# Altium PCB MFU 1.00.PcbDoc (part 2 of 2)
Units mm, origin at the board's own origin, x right, y up, seen from the top; angles counter-clockwise.
Board outline 134 x 96 mm, 2 copper layers (Top Layer, Bottom Layer), stack 1.6 mm thick; 195 components, 155 nets, 750 pads, 199 vias.
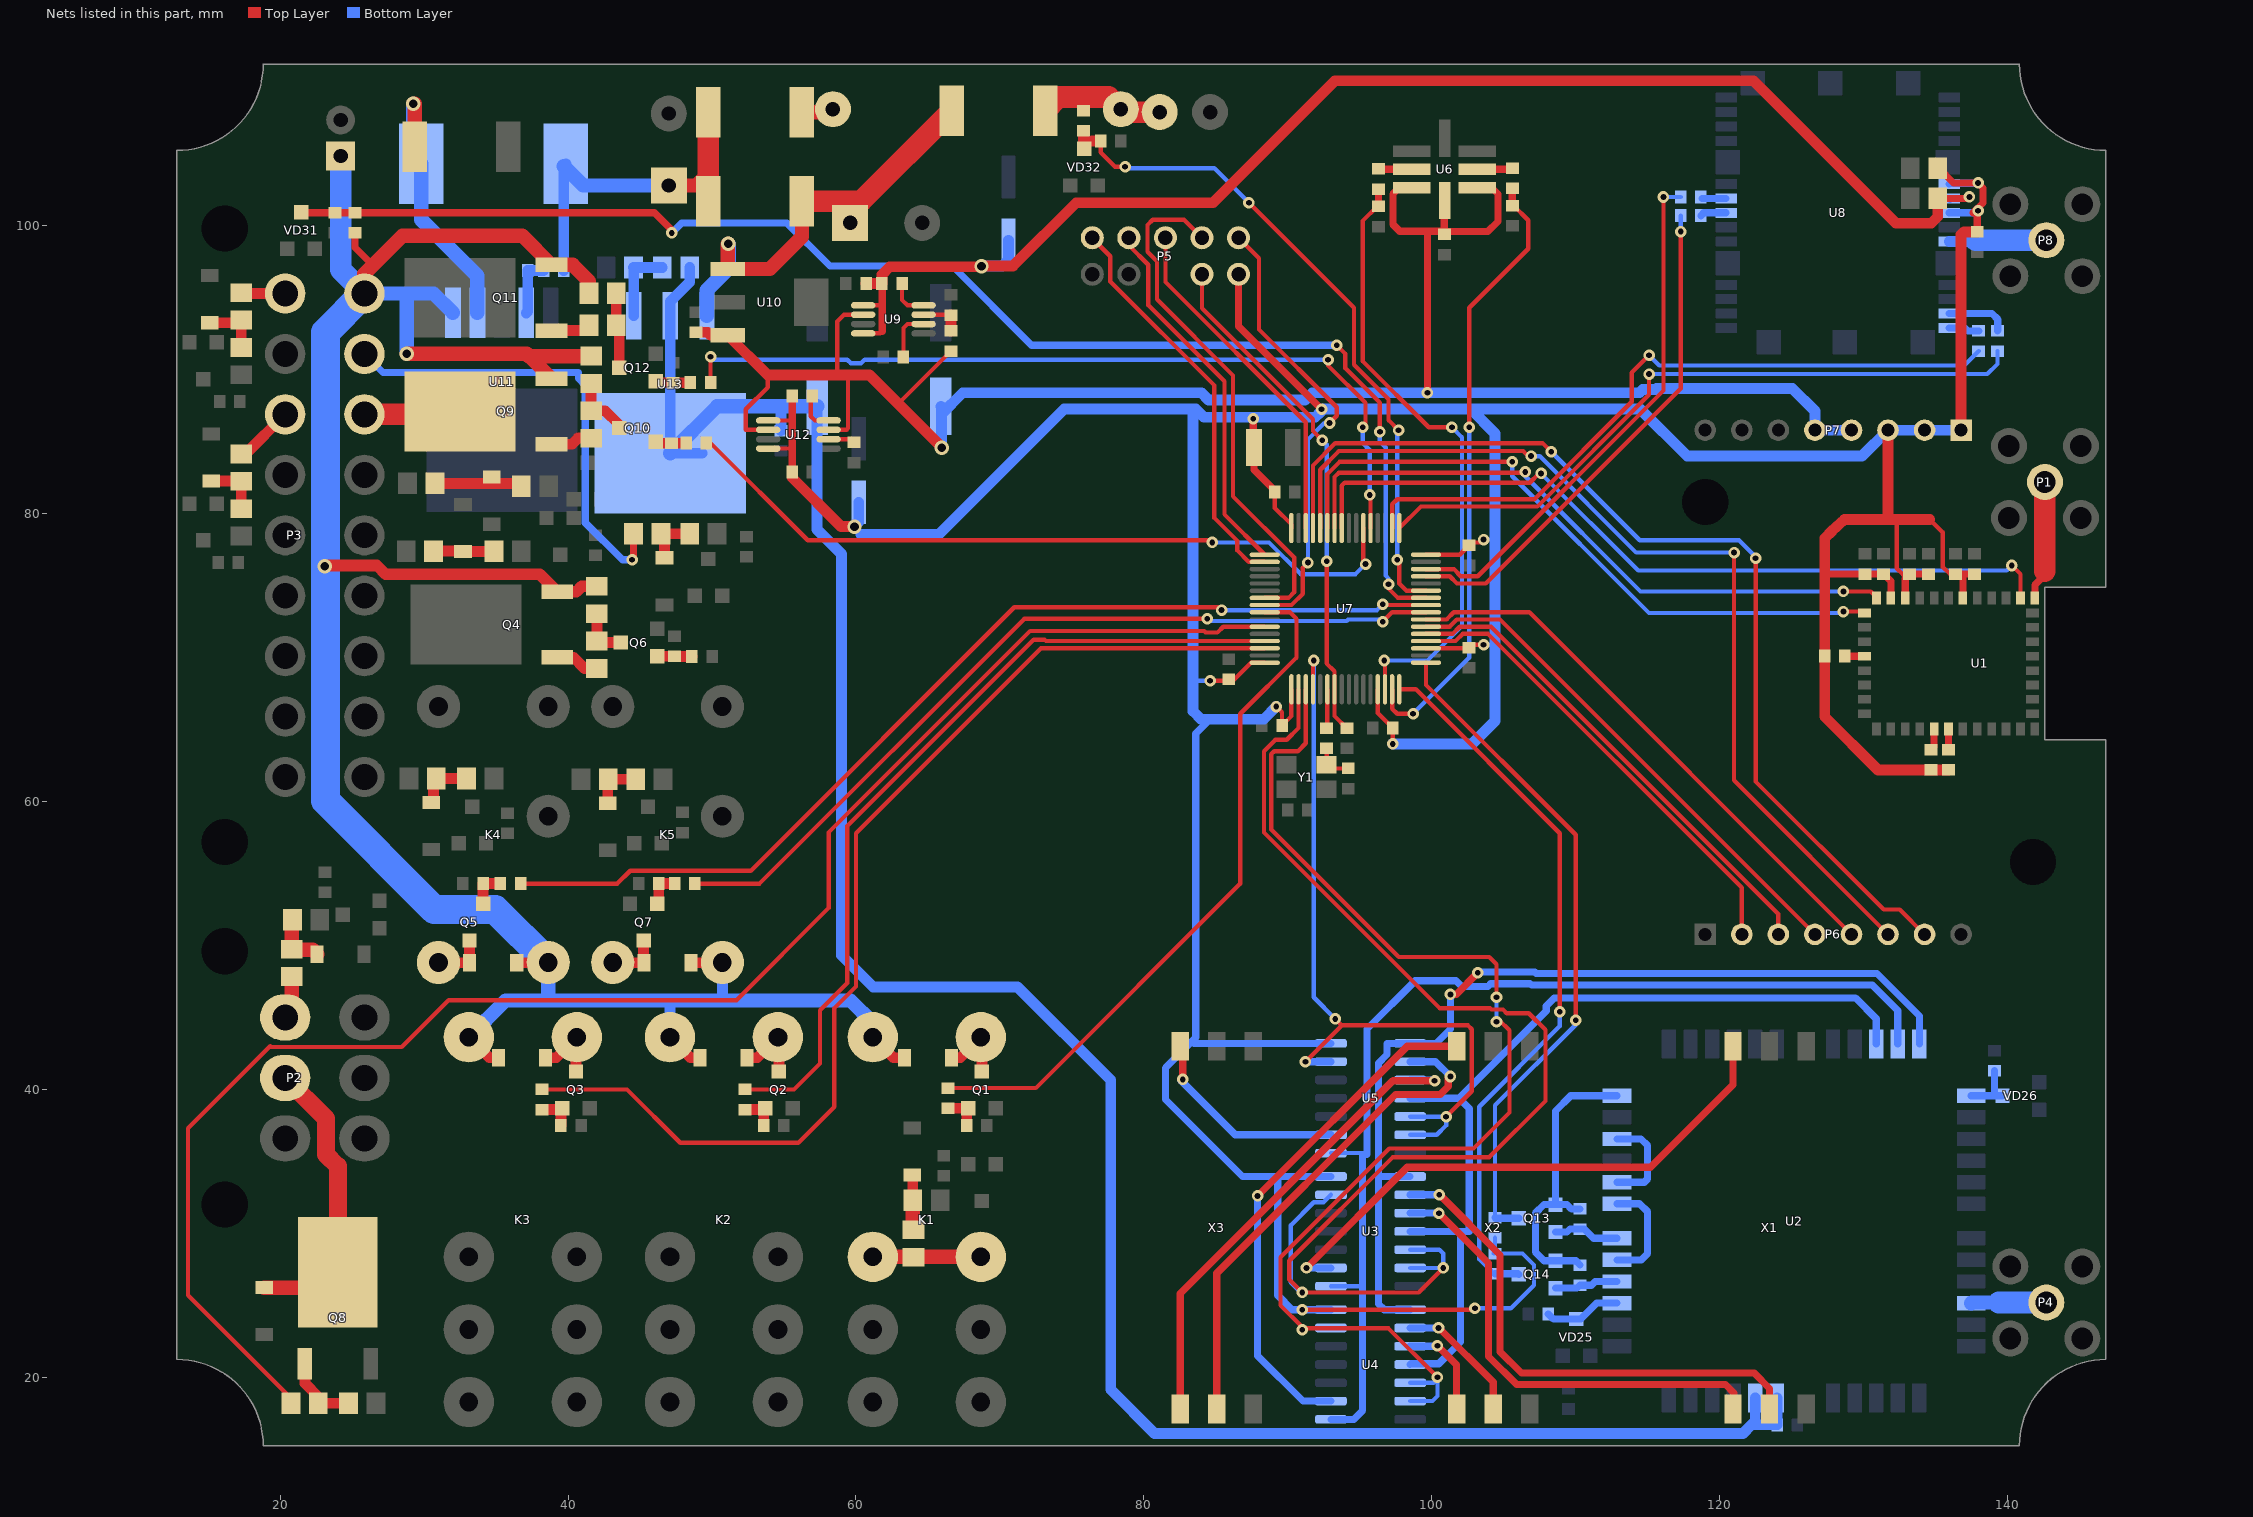
[diagram p2: the nets of this part, all layers, seen from the top]

## Via types
v1: diameter 0.8, hole 0.4, Top Layer to Bottom Layer, tented both sides, 192 vias
v2: diameter 1, hole 0.6, Top Layer to Bottom Layer, tented both sides, 7 vias

## Nets (pads, with @x,y where several pads share a name; then routed paths per layer and width w, separated by ;. In a path a pad name is that pad's centre, name@x,y a point inside that pad or via, vN(x,y) a via of type N, cw(c..) or ccw(c..) an arc to the next point about the centre after c; other vN are vias at no path point) (continued)
NetC20_1: C20.1 R56.1 Y1.1 | length 3
  Top Layer w0.3: R56.1@92.7,63.9 Y1.1@92.7,62.55 92.95,62.3 C20.1@94.2,62.3
NetC32_1: C32.1 R61.1 U9.7 | length 3
  Top Layer w0.3: U9.7@64.7,93.825 66.575,93.825 C32.1@66.6,93.8
  Top Layer w0.75: R61.1@66.6,92.7 C32.1@66.6,93.8
NetC35_1: C35.1 U9.6 | length 3.5
  Top Layer w0.3: C35.1@63.3,90.9 63.3,92.9 63.575,93.175 U9.6@64.7,93.175
NetC37_1: C37.1 L1.2 R62.2 VD27.2 VD30.2 | length 24.6
  Top Layer w1: C37.1@47,102.8 48.9,102.8 49.75,103.65
  Top Layer w1.5: VD27.2@49.75,101.7 49.75,103.65 VD30.2@49.75,107.9
  Bottom Layer w0.75: R62.2@39.7,96.9 39.7,104.15 L1.2@39.85,104.3
  Bottom Layer w1: L1.2@39.7,104.15 41.05,102.8 C37.1@47,102.8
NetC38_1: C38.1 U10.1 U13.3 VD27.1 VD29.1 | length 30.8
  Top Layer w1: v2(51.125,98.75) 51.1,98.725 U10.1@51.1,97 54,97 56.25,99.25 VD27.1@56.25,101.7
  Top Layer w1.5: VD27.1@56.25,101.7 60.35,101.7 ; C38.1@59.6,100.2 59.6,100.95 60.35,101.7 ; VD29.1@66.65,108 60.35,101.7
  Bottom Layer w1: U13.3@49.64,93.75 49.64,95.515 51.175,97.05 51.175,98.7 v2(51.125,98.75)
NetC45_1: C45.1 U12.6 | length 1.8
  Top Layer w0.3: U12.6@58.1,85.175 59.625,85.175 C45.1@59.85,84.95
NetK1_1: K1.1 Q1.3 VD3.2 | length 5
  Top Layer w0.75: VD3.2@66.635,42.2 67.245,42.2 K1.1@68.675,43.63 68.75,43.555 Q1.3@68.75,41.25
NetK1_4: K1.4 R4.1 | length 7.5
  Top Layer w1: K1.4@61.175,28.37 K1.4@68.675,28.37
NetK2_1: K2.1 Q2.3 VD4.2 | length 5.1
  Top Layer w0.75: VD4.2@52.435,42.2 53.148,42.2 K2.1@54.578,43.63 54.65,43.558 Q2.3@54.65,41.25
NetK3_1: K3.1 Q3.3 VD5.2 | length 5.1
  Top Layer w0.75: VD5.2@38.435,42.2 39.178,42.2 K3.1@40.55,43.572 ; Q3.3@40.55,41.25 K3.1@40.55,43.572 ; K3.1@40.608,43.63 K3.1@40.55,43.572
NetK4_1: K4.1 Q5.3 VD6.2 | length 3.7
  Top Layer w0.75: K4.1@31,48.82 31.02,48.8 VD6.2@33.165,48.8 33.15,48.815 Q5.3@33.15,50.35
NetK5_1: K5.1 Q7.3 VD7.2 | length 3.7
  Top Layer w0.75: K5.1@43.1,48.82 43.12,48.8 VD7.2@45.265,48.8 45.25,48.815 Q7.3@45.25,50.35
NetL1_1: L1.1 U11.2 VD28.1 | length 19.4
  Top Layer w1: v2(29.25,108.475) 29.35,108.475 VD28.1@29.35,105.5
  Bottom Layer w1: v2(29.25,108.475) 29.25,104.85 L1.1@29.8,104.3 29.8,100.425 33.7,96.525 U11.2@33.7,93.95
NetP1_1: P1.1 U1.1@141.9,74.15 | length 7.7
  Top Layer w0.5: U1.1@141.9,74.15 141.9,75.049 142.351,75.5
  Top Layer w1.5: 142.6,76 P1.1@142.6,82.2
NetP4_1: P4.1 U2.21 | length 5.2
  Bottom Layer w1: U2.21@137.48,25.16 137.52,25.2 139.4,25.2
  Bottom Layer w1.5: 139.4,25.2 P4.1@142.7,25.2
NetP8_1: P8.1 U8.25 | length 6.6
  Bottom Layer w0.75: U8.25@135.95,98.9 137.7,98.9
  Bottom Layer w1.5: 137.8,99 P8.1@142.7,99
NetQ1_1: Q1.1 R6.1 R9.2 | length 2.6
  Top Layer w0.75: R6.1@66.4,38.7 Q1.1@67.8,38.7 67.7,38.6 R9.2@67.7,37.5
NetQ2_1: Q2.1 R7.1 R10.2 | length 2.5
  Top Layer w0.75: R7.1@52.3,38.6 Q2.1@53.6,38.6 ; R10.2@53.6,37.5 Q2.1@53.6,38.6 ; Q2.1@53.7,38.7 Q2.1@53.6,38.6
NetQ3_1: Q3.1 R8.1 R11.2 | length 2.5
  Top Layer w0.75: R8.1@38.2,38.6 Q3.1@39.5,38.6 ; R11.2@39.5,37.5 Q3.1@39.5,38.6 ; Q3.1@39.6,38.7 Q3.1@39.5,38.6
NetQ4_1: Q4.1 R13.1 | length 3.1
  Top Layer w0.75: Q4.1@39.25,70.02 40.38,70.02 41.15,69.25 R13.1@42,69.25
NetQ5_1: Q5.1 R14.1 R19.2 | length 2.6
  Top Layer w0.75: Q5.1@34.1,52.9 R19.2@34.1,54.3 R14.1@35.3,54.3
NetQ6_1: Q6.1 R15.1 R20.2 | length 2.4
  Top Layer w0.75: Q6.1@46.2,70.1 R20.2@47.4,70.1 47.425,70.075 R15.1@48.6,70.075
NetQ6_3: Q6.3 R12.1 R13.2 | length 3.6
  Top Layer w0.75: R12.1@42,73.05 R13.2@42,71.15 42.1,71.05 Q6.3@43.65,71.05
NetQ7_1: Q7.1 R16.1 R21.2 | length 2.5
  Top Layer w0.75: Q7.1@46.2,52.9 46.3,53 R21.2@46.3,54.3 R16.1@47.4,54.3
NetQ8_1: Q8.1 R22.1 R25.2 | length 5.2
  Top Layer w0.75: Q8.1@21.72,20.95 21.72,19.585 22.65,18.655 R22.1@22.65,18.2 R25.2@24.75,18.2
NetQ9_1: Q9.1 R35.1 | length 2.9
  Top Layer w0.75: Q9.1@38.85,84.82 40.27,84.82 40.7,85.25 R35.1@41.6,85.25
NetQ10_1: Q10.1 R36.1 R37.2 | length 2.1
  Top Layer w0.75: Q10.1@46.1,85 46.2,84.9 R36.1@48.2,84.9
NetQ10_3: Q10.3 R34.1 R35.2 | length 4.5
  Top Layer w0.75: R34.1@41.6,89.05 R35.2@41.6,87.15 42.575,87.15 43.55,86.175 Q10.3@43.55,85.95
NetQ11_1: Q11.1 R39.1 | length 2.8
  Top Layer w0.75: Q11.1@38.85,92.72 41.07,92.72 R39.1@41.45,93.1
NetQ12_1: Q12.1 R40.1 R41.2 | length 2.4
  Top Layer w0.75: Q12.1@46.1,89.2 46.2,89.1 R41.2@47.3,89.1 R40.1@48.5,89.1
NetQ12_3: Q12.3 R38.1 R39.2 | length 5.2
  Top Layer w0.75: R38.1@43.35,95.3 R39.2@43.35,93.1 43.55,92.9 Q12.3@43.55,90.15
NetQ13_1: Q13.1 Q14.1 R48.1 R49.1 U2.46 | length 20.9
  Bottom Layer w0.5: R49.1@110.3,27.8 110,28.1 Q14.1@108.6,28.1 107.8,28.1 107.2,28.7 107.2,31.4 107.8,32 Q13.1@108.6,32 ; R48.1@110.3,31.7 109.7,31.7 109.4,32 Q13.1@108.6,32 ; U2.46@112.88,39.56 109.66,39.56 108.6,38.5 Q13.1@108.6,32
NetQ13_2: Q13.2 R48.2 U2.40 | length 4.6
  Bottom Layer w0.5: Q13.2@108.6,30.1 109.4,30.1 109.6,30.3 R48.2@110.3,30.3 110.6,30.3 111.24,29.66 U2.40@112.88,29.66
NetQ13_3: Q13.3 R46.2 U7.17 | length 46.8
  Top Layer w0.3: U7.17@99.6,69.65 99.6,68.1 110,57.7 v1(110,44.8)
  Bottom Layer w0.3: R46.2@104.4,31.1 104.4,38.9 110,44.5 v1(110,44.8)
  Bottom Layer w0.5: R46.2@104.4,31.1 104.45,31.05 Q13.3@106.05,31.05
NetQ14_2: Q14.2 R49.2 U2.38 | length 4.5
  Bottom Layer w0.5: Q14.2@108.6,26.2 110.1,26.2 R49.2@110.3,26.4 111.1,26.4 111.36,26.66 U2.38@112.88,26.66
NetQ14_3: Q14.3 R47.2 U7.16 | length 50.4
  Top Layer w0.3: U7.16@97.75,67.8 98.9,67.8 108.9,57.8 v1(108.9,45.4)
  Bottom Layer w0.3: R47.2@104.4,27.2 104.314,27.2 103.3,28.214 103.3,38.8 108.9,44.4 v1(108.9,45.4)
  Bottom Layer w0.5: R47.2@104.4,27.2 106,27.2 Q14.3@106.05,27.15
NetR1_1: R1.1 U1.16 | length 1.4
  Top Layer w0.5: R1.1@128.7,70.1 U1.16@130.05,70.1
NetR2_1: R2.1 U1.26 | length 1.4
  Top Layer w0.5: R2.1@135.9,63.6 U1.26@135.9,65.05
NetR3_1: R3.1 U1.25 | length 1.5
  Top Layer w0.5: R3.1@134.7,63.6 134.9,63.8 U1.25@134.9,65.05
NetR4_2: R4.2 R5.1 VD2.1 | length 3.9
  Top Layer w0.75: VD2.1@63.9,34.065 63.95,34.015 R5.1@63.95,32.3
  Top Layer w1: R5.1@63.95,32.3 63.95,30.3 R4.2@64,30.25
NetR6_2: R6.2 U7.57 | length 48.6
  Top Layer w0.3: R6.2@66.4,40.1 72.5,40.1 86.7,54.3 86.7,66.1 90.6,70 90.6,72.7 90.15,73.15 U7.57@88.4,73.15
NetR7_2: R7.2 U7.61 | length 57.6
  Top Layer w0.3: R7.2@52.3,40 55.7,40 57.5,41.8 57.5,45.5 59.4,47.4 59.4,58.3 72.35,71.25 73.099,71.25 73.198,71.15 U7.61@88.4,71.15
NetR8_2: R8.2 U7.62 | length 76.2
  Top Layer w0.3: R8.2@38.2,40 44.1,40 47.8,36.3 56,36.3 58.5,38.8 58.5,45.651 60,47.151 60,57.8 72.85,70.65 85.305,70.65 86.495,70.65 U7.62@88.4,70.65
NetR14_2: R14.2 U7.25 | length 71.1
  Top Layer w0.3: R14.2@36.7,54.3 43.414,54.3 44.314,55.2 52.7,55.2 71,73.5 85.2,73.5 v1(85.4,73.3) ; v1(96.6,73.7) 96.65,73.65 U7.25@99.6,73.65
  Bottom Layer w0.3: v1(85.4,73.3) 96.2,73.3 v1(96.6,73.7)
NetR16_2: R16.2 U7.24 | length 58.9
  Top Layer w0.3: R16.2@48.8,54.3 53.3,54.3 71.7,72.7 v1(84.4,72.7) ; v1(96.6,72.5) 97.25,73.15 U7.24@99.6,73.15
  Bottom Layer w0.3: v1(84.4,72.7) 84.55,72.55 94.089,72.55 94.189,72.65 96.45,72.65 v1(96.6,72.5)
NetR17_2: R17.2 R18.1 VD10.1 | length 4
  Top Layer w1: R18.1@20.85,51.8 20.8,51.75 R17.2@20.8,49.75 20.85,49.7 22.265,49.7 VD10.1@22.565,49.4
NetR22_2: R22.2 U7.59 | length 114.5
  Top Layer w0.3: R22.2@20.75,18.2 20.75,18.55 13.6,25.7 13.6,37.299 19.301,43 19.351,42.95 28.45,42.95 31.7,46.2 51.7,46.2 58.1,52.6 58.1,57.849 72.101,71.85 84.189,71.85 84.289,71.75 85.11,71.75 85.511,72.15 U7.59@88.4,72.15
NetR23_2: R23.2 R24.1 VD14.1 | length 3.8
  Top Layer w0.75: VD14.1@30.5,59.935 30.65,60.085 30.65,61.6 R24.1@32.75,61.6
NetR26_1: R26.1 R27.2 VD13.1 | length 3.6
  Top Layer w0.75: VD13.1@42.75,59.885 42.75,61.5 R27.2@42.8,61.55 R26.1@44.7,61.55
NetR28_2: R28.2 R29.1 VD18.1 | length 4.2
  Top Layer w0.75: R28.2@30.65,77.4 32.665,77.4 VD18.1@32.7,77.365 34.815,77.365 R29.1@34.85,77.4
NetR30_1: R30.1 R31.2 VD17.1 | length 6.1
  Top Layer w0.75: R31.2@30.75,82.1 36.55,82.1 R30.1@36.75,81.9
NetR32_1: R32.1 R33.2 VD20.1 | length 4
  Top Layer w0.75: VD20.1@15.2,82.265 17.285,82.265 R33.2@17.3,82.25 R32.1@17.3,80.35
NetR36_2: R36.2 U7.38 | length 52.4
  Top Layer w0.3: R36.2@49.6,84.9 49.9,84.9 56.65,78.15 84.6,78.15 v1(84.75,78) ; U7.38@95.25,79 95.25,76.65 v1(95.4,76.5)
  Bottom Layer w0.3: v1(84.75,78) 88.7,78 90.9,75.8 94.7,75.8 v1(95.4,76.5)
NetR40_2: R40.2 U7.37 | length 58.1
  Top Layer w0.3: R40.2@49.9,89.1 v1(49.9,90.9) ; v1(92.8,90.7) 92.8,90.3 95.4,87.7 95.4,86.2 v1(95.2,86) ; v1(95.7,81.3) 95.75,81.25 U7.37@95.75,79
  Bottom Layer w0.3: v1(49.9,90.9) 50.1,90.7 59.398,90.7 59.648,90.45 60.352,90.45 60.602,90.7 v1(92.8,90.7) ; v1(95.2,86) 95.2,84.9 95.7,84.4 v1(95.7,81.3)
NetR42_2: R42.2 R43.1 VD22.1 | length 3.8
  Top Layer w0.75: VD22.1@46.7,76.935 46.7,78.35 R42.2@46.45,78.6 R43.1@48.45,78.6
NetR44_1: R44.1 R45.2 VD24.1 | length 4.2
  Top Layer w0.75: VD24.1@15.1,93.265 17.115,93.265 R45.2@17.3,93.45 R44.1@17.3,91.55
NetR50_2: R50.2 U2.12 VD26.3 | length 3.9
  Bottom Layer w0.5: U2.12@137.48,39.56 139.1,39.56 ; R50.2@139.1,41.3 139.1,39.56 ; VD26.3@139.65,39.55 139.64,39.56 139.1,39.56
NetR51_2: R51.2 U2.37 VD25.3 | length 5.4
  Bottom Layer w0.5: R51.2@108.1,24.4 108.45,24.05 VD25.3@110.05,24.05 110.35,24.05 111.46,25.16 U2.37@112.88,25.16
NetR52_1: R52.1 R55.1 U7.14 | length 43.1
  Top Layer w0.3: R55.1@96.3,101.35 96.214,101.35 95.2,100.336 95.2,90.6 99.8,86 v1(101.4,86) ; v1(96.7,69.8) 96.75,69.75 U7.14@96.75,67.8
  Top Layer w0.5: R55.1@96.3,101.35 R52.1@96.3,102.55
  Bottom Layer w0.3: v1(96.7,69.8) 99.7,69.8 102.1,72.2 102.1,85.3 v1(101.4,86)
NetR52_2: R52.2 U6.6 | length 2.3
  Top Layer w0.5: R52.2@96.3,103.95 96.325,103.925 U6.6@98.625,103.925
NetR53_1: R53.1 R54.1 U7.15 | length 43.3
  Top Layer w0.3: U7.15@97.25,67.8 97.25,66.45 97.6,66.1 v1(98.7,66.1) ; v1(102.6,86) 102.6,94.3 106.7,98.4 106.7,100.386 105.686,101.4 R54.1@105.6,101.4
  Top Layer w0.5: R54.1@105.6,101.4 R53.1@105.6,102.6
  Bottom Layer w0.3: v1(98.7,66.1) 102.6,70 v1(102.6,86)
NetR53_2: R53.2 U6.2 | length 2.5
  Top Layer w0.5: U6.2@103.175,103.925 105.525,103.925 R53.2@105.6,104
NetR56_2: R56.2 U7.6 | length 2.5
  Top Layer w0.3: R56.2@92.7,65.3 92.75,65.35 U7.6@92.75,67.8
NetR57_1: R57.1 U7.29 | length 35.5
  Top Layer w0.3: U7.29@99.6,75.65 101.25,75.65 101.75,75.15 103.75,75.15 117.3,88.7 v1(117.3,99.6)
  Bottom Layer w0.3: v1(117.3,99.6) R57.1@117.3,100.7
NetR57_2: R57.2 U8.8 | length 1.8
  Bottom Layer w0.5: R57.2@118.7,100.7 118.9,100.9 U8.8@120.45,100.9
NetR58_1: R58.1 U7.30 | length 36.7
  Top Layer w0.3: U7.30@99.6,76.15 100.791,76.15 101.55,76.15 101.8,75.9 101.8,75.855 102.005,75.65 103.195,75.65 116.1,88.555 v1(116.1,102)
  Bottom Layer w0.3: v1(116.1,102) R58.1@117.3,102
NetR58_2: R58.2 U8.9 | length 1.7
  Bottom Layer w0.5: R58.2@118.8,101.9 U8.9@120.45,101.9
NetR59_1: R59.1 U7.33 | length 48
  Top Layer w0.3: U7.33@97.75,79 99.25,80.5 107.338,80.5 115.1,88.262 v1(115.1,89.7)
  Bottom Layer w0.3: v1(115.1,89.7) 138.6,89.7 139.3,90.4 R59.1@139.3,91.3
NetR59_2: R59.2 U8.29 | length 4.4
  Bottom Layer w0.5: U8.29@135.95,93.9 138.925,93.9 139.325,93.5 139.325,92.725 R59.2@139.3,92.7
NetR60_1: R60.1 U7.34 | length 48.6
  Top Layer w0.3: U7.34@97.25,79 97.25,80.65 97.6,81 107.131,81 113.9,87.769 113.9,89.8 v1(115.1,91)
  Bottom Layer w0.3: v1(115.1,91) 115.8,90.3 137,90.3 R60.1@138,91.3
NetR60_2: R60.2 U8.30 | length 2.1
  Bottom Layer w0.5: U8.30@135.95,92.9 137.05,92.9 137.25,92.7 R60.2@138,92.7
NetR62_1: R62.1 R64.2 U11.4 | length 4.1
  Bottom Layer w0.75: U11.4@37.1,93.95 37.2,94.05 R64.2@37.2,96.9 R62.1@38.3,96.9
NetR63_1: R63.1 R67.2 U7.26 VD31.3 | length 97.7
  Top Layer w0.3: v1(93.4,91.7) 94,91.1 94,90.103 96.4,87.703 v1(96.4,85.7) ; v1(97,75.1) 97,74.8 97.65,74.15 U7.26@99.6,74.15
  Top Layer w0.5: VD31.3@21.45,100.95 21.5,100.9 R63.1@25.2,100.9 46,100.9 47.2,99.7 v1(47.2,99.5)
  Bottom Layer w0.3: v1(96.4,85.7) 96.4,85 96.8,84.6 96.8,75.7 97,75.5 v1(97,75.1)
  Bottom Layer w0.5: v1(47.2,99.5) 47.9,100.2 55.2,100.2 58.2,97.2 66.7,97.2 72.2,91.7 v1(93.4,91.7)
NetR65_1: R65.1 R70.2 VD29.2 X4.1 | length 8.8
  Top Layer w1.5: VD29.2@73.15,108 74.1,108.95 77.55,108.95 R65.1@78.4,108.1 78.6,107.9 X4.1@81.1,107.9
NetR65_2: R65.2 VD30.1 | length 2.2
  Top Layer w1: VD30.1@56.25,107.9 58.2,107.9 R65.2@58.4,108.1
NetR66_1: R66.1 U12.8 | length 2.8
  Top Layer w0.3: R66.1@56.975,88.175 56.85,88.05 56.85,86.775 57.15,86.475 U12.8@58.1,86.475
NetR68_1: R68.1 R69.2 U13.1 | length 5.4
  Bottom Layer w0.75: U13.1@44.56,93.75 44.56,97.09 R69.2@44.55,97.1 R68.1@46.55,97.1
NetR70_1: R70.1 R71.2 U7.27 VD32.3 | length 47.5
  Top Layer w0.3: R71.2@77,105.9 77,105.1 78,104.1 v1(78.7,104.1) ; v1(87.3,101.6) 94.6,94.3 94.6,90.351 97,87.951 97,86.5 v1(97.7,85.8) ; v1(97.6,76.8) 97.75,76.65 97.75,75.15 98.25,74.65 U7.27@99.6,74.65
  Top Layer w0.75: VD32.3@75.8,105.4 R70.1@75.8,106.6 ; 76.4,105.9 R71.2@77,105.9
  Bottom Layer w0.3: v1(78.7,104.1) 78.6,104 84.9,104 v1(87.3,101.6) ; v1(97.6,76.8) 97.6,85.7 v1(97.7,85.8)
NetR72_1: R72.1 U9.8 | length 2.8
  Top Layer w0.3: R72.1@63.2,96 63.2,94.85 63.575,94.475 U9.8@64.7,94.475
NetU1_2: U1.2 U7.41 | length 55.3
  Top Layer w0.3: U7.41@93.75,79 93.75,81.95 93.95,82.15 106.811,82.15 107.461,82.8 v1(107.6,82.8) ; v1(140.3,76.4) 140.9,75.8 U1.2@140.9,74.15
  Bottom Layer w0.3: v1(107.6,82.8) 114.35,76.05 139.95,76.05 v1(140.3,76.4)
NetU1_12: U1.12 U7.42 | length 45.2
  Top Layer w0.3: U7.42@93.25,79 93.25,82.55 93.55,82.85 106.45,82.85 v1(106.5,82.9) ; v1(128.6,74.6) 130.5,74.6 130.9,74.2 U1.12@130.9,74.15
  Bottom Layer w0.3: v1(106.5,82.9) 106.5,82.6 114.5,74.6 v1(128.6,74.6)
NetU1_13: U1.13 U7.43 | length 46.5
  Top Layer w0.3: U7.43@92.75,79 92.75,82.757 93.593,83.6 v1(105.6,83.6) ; v1(128.6,73.2) 129.95,73.2 U1.13@130.05,73.1
  Bottom Layer w0.3: v1(105.6,83.6) 105.6,82.6 115.1,73.1 128.6,73.1 v1(128.6,73.2)
NetU2_9: U2.9 U3.4 U4.4 U5.4 | length 63.2
  Bottom Layer w0.5: U4.4@98.5,20.89 98.56,20.95 100.494,20.95 102,22.456 102,30 ; U3.4@98.5,30.14 102.6,30.14 102.6,38.68 101.89,39.39 ; U5.4@98.5,39.39 101.89,39.39 ; U2.9@130.88,43.16 130.88,44.92 129.45,46.35 108.506,46.35 107.95,45.794 107.95,45.45 101.89,39.39
NetU2_10: U2.10 U3.8 U4.8 U5.8 | length 75.1
  Bottom Layer w0.3: U3.8@93,26.33 94.93,26.33 ; U5.8@93,35.58 95.42,35.58 95.2,35.36
  Bottom Layer w0.5: U4.8@93,17.08 94.58,17.08 95.2,17.7 95.2,35.36 ; 95.5,35.5 95.5,44.2 98.85,47.55 101.693,47.55 102.093,47.15 103.906,47.15 104.106,47.35 106.829,47.35 106.929,47.25 130.609,47.25 132.38,45.479 U2.10@132.38,43.16
NetU2_11: U2.11 U3.1 U4.1 U5.1 | length 66.5
  Top Layer w0.5: v1(101.3,46.6) 101.7,46.6 v1(103.2,48.1)
  Bottom Layer w0.5: 96.35,33.95 U3.1@98.5,33.95 ; U4.1@98.5,24.7 96.7,24.7 96.3,25.1 96.3,41.82 96.9,42.42 96.9,43.2 U5.1@98.5,43.2 100.3,43.2 101.3,44.2 v1(101.3,46.6) ; v1(103.2,48.1) 103.25,48.15 107.16,48.15 107.26,48.05 130.94,48.05 133.88,45.11 U2.11@133.88,43.16
NetU2_39: U2.39 U2.41 | length 7.6
  Bottom Layer w0.5: U2.39@112.88,28.16 114.56,28.16 115,28.6 115,31.5 114.44,32.06 U2.41@112.88,32.06
NetU2_42: U2.42 U2.44 | length 6.8
  Bottom Layer w0.5: U2.42@112.88,33.56 114.76,33.56 115,33.8 115,36.1 114.54,36.56 U2.44@112.88,36.56
NetU3_2: U3.2 X1.2 | length 35.9
  Top Layer w0.5: v1(100.52,32.68) 100.564,32.68 104.75,28.494 104.75,21.781 106.231,20.3 122.4,20.3 123.47,19.23 X1.2@123.47,17.8
  Bottom Layer w0.5: U3.2@98.5,32.68 v1(100.52,32.68)
NetU3_3: U3.3 X1.3 | length 32.6
  Top Layer w0.5: v1(100.5,31.4) 103.95,27.95 103.95,21.45 105.9,19.5 120.4,19.5 121,18.9 121,17.87 X1.3@120.93,17.8
  Bottom Layer w0.5: U3.3@98.5,31.41 100.39,31.41 100.4,31.4 v1(100.5,31.4)
NetU3_9: U3.9 X1.6 | length 39.3
  Top Layer w0.5: v1(91.3,27.6) 98.3,34.6 115.2,34.6 120.93,40.33 X1.6@120.93,43
  Bottom Layer w0.5: v1(91.3,27.6) U3.9@93,27.6
NetU4_2: U4.2 X2.2 | length 9.2
  Top Layer w0.5: v1(100.47,23.43) 100.514,23.43 104.27,19.674 X2.2@104.27,17.8
  Bottom Layer w0.5: U4.2@98.5,23.43 v1(100.47,23.43)
NetU4_3: U4.3 X2.3 | length 6.9
  Top Layer w0.5: v1(100.4,22.2) 101.73,20.87 X2.3@101.73,17.8
  Bottom Layer w0.5: U4.3@98.5,22.16 100.36,22.16 v1(100.4,22.2)
NetU4_9: U4.9 X2.6 | length 35.6
  Top Layer w0.5: v1(87.9,32.6) 98.3,43 X2.6@101.73,43
  Bottom Layer w0.5: v1(87.9,32.6) 87.9,21.5 91.05,18.35 U4.9@93,18.35
NetU5_2: U5.2 X3.2 | length 34.9
  Top Layer w0.5: X3.2@85.07,17.8 85.07,27.239 97.481,39.65 100.593,39.65 101.15,40.206 101.15,40.75 v1(101.3,40.9)
  Bottom Layer w0.5: U5.2@98.5,41.93 100.27,41.93 v1(101.3,40.9)
NetU5_3: U5.3 X3.3 | length 33.5
  Top Layer w0.5: X3.3@82.53,17.8 82.53,25.83 97.3,40.6 v1(100.2,40.6)
  Bottom Layer w0.5: U5.3@98.5,40.66 100.14,40.66 v1(100.2,40.6)
NetU5_9: U5.9 X3.6 | length 14.5
  Top Layer w0.5: X3.6@82.53,43 82.7,42.83 v1(82.7,40.7)
  Bottom Layer w0.5: v1(82.7,40.7) 82.6,40.6 86.35,36.85 U5.9@93,36.85
RESET: C21.2 P5.3 U7.7 | length 35.7
  Top Layer w0.3: P5.3@84.04,96.63 84.04,94.267 91.75,86.557 91.75,85.75 v1(92.4,85.1) ; v1(92.7,76.7) 92.7,69.6 93.25,69.05 U7.7@93.25,67.8 93.25,65.95 C21.2@94.1,65.1
  Bottom Layer w0.3: v1(92.4,85.1) 92.7,84.8 v1(92.7,76.7)
SHOCK1: P3.16 R42.1 | length 32.2
  Top Layer w0.5: v1(44.45,76.8) 44.55,76.9 R42.1@44.55,78.6
  Bottom Layer w0.5: P3.16@25.85,91.1 27.15,89.8 40.725,89.8 40.725,89.403 41.2,88.928 41.2,79.375 43.775,76.8 v1(44.45,76.8)
SHOCK2: P3.17 R45.1 | length 3.1
  Top Layer w0.75: R45.1@17.3,95.35 17.35,95.3 P3.17@20.35,95.3
SIM1: U3.5 U3.6 U3.13 U7.2 | length 91.5
  Top Layer w0.3: U7.2@90.75,67.8 90.75,65.105 89.934,64.289 89.137,64.289 88.35,63.502 88.35,57.85 100.55,45.65 104.048,45.65 104.148,45.55 104.852,45.55 104.952,45.55 105.202,45.3 106.746,45.3 107.9,44.146 107.9,39.2 104,35.3 97.3,35.3 90.1,28.1 90.1,26.8 v1(91,25.9) 99.1,25.9 v1(100.8,27.6)
  Bottom Layer w0.3: v1(91,25.9) 90.9,25.9 90.2,26.6 90.2,30.559 91.801,32.16 92.48,32.16 U3.13@93,32.68 ; U3.6@98.5,27.6 v1(100.8,27.6) 100.8,28.6 100.53,28.87 U3.5@98.5,28.87
SIM2: U4.5 U4.6 U4.13 U7.3 | length 86.2
  Top Layer w0.3: v1(91,23.3) v1@91,23.4 ; U7.3@91.25,67.8 91.25,64.05 90.7,63.5 89.055,63.5 88.85,63.295 88.85,58.057 97.707,49.2 104,49.2 104.5,48.7 v1(104.5,46.4) ; v1(100.4,20) 97,23.4 v1@91,23.4 ; v1(104.5,44.7) 104.5,44.8 104.706,44.8 105.4,44.106 105.4,38.4 102.9,35.9 97.8,35.9 97.051,35.9 89.5,28.349 89.5,24.998 91,23.498 v1@91,23.4
  Bottom Layer w0.3: v1(91,23.3) 91.13,23.43 U4.13@93,23.43 ; U4.6@98.5,18.35 100.05,18.35 100.4,18.7 v1@100.4,19.9 ; U4.5@98.5,19.62 100.12,19.62 v1@100.4,19.9 ; v1(100.4,20) v1@100.4,19.9 ; v1(104.5,44.7) v1(104.5,46.4)
SIM3: U5.5 U5.6 U5.13 U7.4 | length 55.4
  Top Layer w0.3: v1(91.23,41.93) 93.75,44.45 ; U7.4@91.75,67.8 91.75,69.75 v1(91.8,69.8) ; v1(93.3,44.9) 93.75,44.45 ; v1(101,38.1) 102.78,39.88 102.78,44.186 102.516,44.45 93.75,44.45
  Bottom Layer w0.3: v1(91.8,69.8) 91.8,46.4 v1(93.3,44.9) ; U5.6@98.5,36.85 100.35,36.85 101,37.5 v1(101,38.1) 98.52,38.1 U5.5@98.5,38.12
  Bottom Layer w0.5: v1(91.23,41.93) U5.13@93,41.93
SIREN: P3.14 Q9.4 | length 6.7
  Top Layer w1.5: P3.14@25.85,86.9 32.3,86.9 Q9.4@32.5,87.1
SPI_MISO: P6.4 U7.22 | length 36.3
  Top Layer w0.3: U7.22@99.6,72.15 101.243,72.15 101.743,72.65 104.745,72.65 P6.4@126.62,50.775
SPI_MOSI: P6.5 U7.23 | length 39
  Top Layer w0.3: U7.23@99.6,72.65 101.036,72.65 101.536,73.15 106.785,73.15 P6.5@129.16,50.775
SPI_SCK: P6.3 U7.21 | length 34.4
  Top Layer w0.3: U7.21@99.6,71.65 101.45,71.65 101.95,72.15 104.118,72.15 124.08,52.188 P6.3@124.08,50.775
SPI_SS: P6.2 U7.20 | length 32.7
  Top Layer w0.3: U7.20@99.6,71.15 101.243,71.15 101.657,71.15 102.157,71.65 103.911,71.65 121.54,54.021 P6.2@121.54,50.775
ST_IN: P2.5 R17.1 | length 3
  Top Layer w1: P2.5@20.35,45 20.8,45.45 R17.1@20.8,47.85
ST_OUT: P2.3 Q8.4 VD8.2 | length 20.6
  Top Layer w1: VD8.2@18.9,26.235 22.935,26.235 Q8.4@24,27.3
  Top Layer w1.25: P2.3@20.35,40.8 23.175,37.975 23.175,35.492 24,34.667 Q8.4@24,27.3
TCK: P5.8 U7.49 | length 25.9
  Top Layer w0.3: P5.8@78.96,99.17 78.96,98.64 80.31,97.29 80.31,94.49 85.6,89.2 85.6,79.95 U7.49@88.4,77.15
TDI: P5.10 U7.50 | length 28.1
  Top Layer w0.3: P5.10@76.42,99.17 76.42,99.13 77.67,97.88 77.67,96.13 84.9,88.9 84.9,79.7 86.5,78.1 86.5,77.443 87.293,76.65 87.95,76.65 U7.50@88.4,76.65
TDO: P5.4 U7.55 | length 36.4
  Top Layer w0.3: P5.4@84.04,99.17 82.79,100.42 80.62,100.42 80.25,100.05 80.25,98.199 80.91,97.539 80.91,94.89 86.2,89.6 86.2,81.2 90.45,76.95 90.45,74.55 90.05,74.15 U7.55@88.4,74.15
TMS: P5.6 U7.46 | length 24.2
  Top Layer w0.3: P5.6@81.5,99.17 81.51,99.16 81.51,96.09 91.25,86.35 U7.46@91.25,79
TR_GP1: P6.6 U7.44 | length 67.3
  Top Layer w0.3: U7.44@92.25,79 92.25,83.05 93.55,84.35 106.35,84.35 106.8,83.9 v1(106.9,84) ; v1(121,77.3) 121,61.475 P6.6@131.7,50.775
  Bottom Layer w0.3: v1(106.9,84) 107.5,84 114.2,77.3 v1(121,77.3)
TR_GP2: P6.7 U7.45 | length 70.8
  Top Layer w0.3: U7.45@91.75,79 91.75,83.35 93.3,84.9 107.7,84.9 v1(108.3,84.3) ; v1(122.5,76.9) 122.5,61.4 131.4,52.5 132.515,52.5 P6.7@134.24,50.775
  Bottom Layer w0.3: v1(108.3,84.3) 114.45,78.15 121.352,78.15 122.5,77.002 v1(122.5,76.9)
TRST: P5.2 U7.56 | length 32
  Top Layer w0.3: P5.2@86.58,98.92 P5.2@86.58,99.17 88,97.75 88,92.8 93.4,87.4 93.4,86.8 v1(92.9,86.3) ; U7.56@88.4,73.65 90.257,73.65 91.05,74.443 91.05,76.25 v1(91.4,76.6)
  Bottom Layer w0.3: v1(91.4,76.6) 91.4,85.161 92.539,86.3 v1(92.9,86.3)
TRUNK_TR: P3.13 R33.1 | length 4.2
  Top Layer w0.75: R33.1@17.3,84.15 17.6,84.15 P3.13@20.35,86.9
VCC+1.8V: C30.1 C33.1 C34.1 R72.2 U8.22 U9.1 U9.4 | length 99.6
  Top Layer w0.3: U9.4@60.5,92.525 61.675,92.525 61.825,92.675 ; U9.1@60.5,94.475 61.65,94.475 61.825,94.3 ; R72.2@61.8,96 R72.2@61.825,95.975
  Top Layer w0.5: 61.825,92.675 61.825,94.3 R72.2@61.825,95.975 ; C30.1@135.15,101.9 137.252,101.9 v1(137.357,102.005)
  Top Layer w0.75: C33.1@60.7,96 R72.2@61.8,96 61.8,96.6 62.35,97.15 68.725,97.15 v2(68.725,97.2) 70.9,97.2 75.3,101.6 84.8,101.6 93.275,110.075 122.35,110.075 132.25,100.175 134.7,100.175 135.15,100.625 C30.1@135.15,101.9
  Bottom Layer w0.5: U8.22@136,101.85 U8.22@135.95,101.9 137.35,101.9 137.357,101.907 v1(137.357,102.005)
  Bottom Layer w0.75: v2(68.725,97.2) 70.175,97.2 70.6,97.625 C34.1@70.6,99
VCC+3.3V: C1.1 C2.1 C3.1 C4.1 C5.1 C6.1 C22.2 C23.2 C24.2 C25.2 C26.2 C27.2 C28.2 C29.1 C31.1 C41.1 C42.1 P5.1 P7.1 P7.2 P7.3 R1.2 R2.2 R3.2 R46.1 R47.1 R66.2 U1.6 U1.10 U1.11 U3.14 U4.14 U5.14 U7.1 U7.13 U7.19 U7.32 U7.48 U7.64 U8.21 U8.23 U12.1 U12.4 | length 372.2
  Top Layer w0.3: U12.4@53.9,84.525 55.55,84.525 55.575,84.55 ; U12.1@53.9,86.475 55.475,86.475 55.575,86.375 ; v1(84.6,68.4) 86.2,68.4 87.45,69.65 U7.64@88.4,69.65 ; C26.2@89.1,81.5 89.1,80.4 90.25,79.25 U7.48@90.25,79 ; v1(89.2,66.6) 89.6,66.2 C24.2@89.6,65.3 90.25,65.95 U7.1@90.25,67.8 ; v1(91,24.7) 102.9,24.7 v1(103,24.8) ; U7.13@96.25,67.8 96.25,66.15 C23.2@97.3,65.1 ; v1(97.3,64) C23.2@97.3,65.1 ; C23.2@97.3,65.3 C23.2@97.3,65.1 ; U7.19@99.6,70.65 102.55,70.65 C27.2@102.6,70.7 102.8,70.9 v1(103.6,70.9) ; U7.32@99.6,77.15 101.95,77.15 C28.2@102.6,77.8 102.8,78 103.4,78 v1(103.6,78.2) ; 132.3,79.6 132.3,76.2 132.7,75.8 C6.1@133.2,75.8 ; 134.6,79.6 135.5,78.7 135.5,76.3 136,75.8 C1.1@136.4,75.8
  Top Layer w0.5: C41.1@55.575,82.9 55.575,84.55 55.575,86.375 R66.2@55.575,88.175 ; P5.1@86.58,96.63 86.58,93.017 v1(92.349,87.249) ; C22.2@87.6,84.475 v1(87.6,86.6) ; C22.2@87.65,84.6 87.65,83.05 C26.2@89.2,81.5 ; 127.3,75.8 C5.1@130.1,75.8 C4.1@131.4,75.8 131.9,75.3 U1.11@131.9,74.15 ; U1.10@132.9,74.15 132.9,75.5 C6.1@133.2,75.8 C3.1@134.5,75.8 ; C29.1@135.15,104 135.228,104 136.248,102.98 v1(137.957,102.98) 138.307,102.63 138.307,101.582 v1@137.625,100.9 ; C1.1@136.4,75.8 C2.1@137.7,75.8 ; U1.6@136.9,74.15 136.9,75.65 ; C31.1@137.9,99.575 137.9,100.993 v1(137.957,101.05)
  Top Layer w0.75: C41.1@55.575,82.9 55.575,82.495 58.971,79.1 v2(59.9,79.1) ; P7.3@131.7,85.8 131.7,79.6 ; 134.6,79.6 131.7,79.6 ; R2.2@135.9,62.2 R3.2@134.7,62.2 131,62.2 127.3,65.9 R1.2@127.3,70.1 127.3,75.8 127.3,78.3 127.8,78.8 128.675,79.6 131.7,79.6 ; P7.1@136.78,85.8 136.775,85.805 136.775,99.375 136.975,99.575 C31.1@137.9,99.575
  Bottom Layer w0.3: 83.6,68.4 v1(84.6,68.4) ; v1(103,24.8) 105.5,24.8 107.1,26.4 107.1,27.81 106.31,28.6 R47.1@104.4,28.6 ; v1(103.6,70.9) 104.4,70.9 ; v1(103.6,78.2) 104.3,78.2 104.4,78.1 104.4,77.7 ; R47.1@104.314,28.6 R47.1@104.4,28.6 ; R46.1@104.4,29.7 R47.1@104.4,28.6
  Bottom Layer w0.5: 84.596,65.725 83.6,64.729 83.6,43.6 83.35,43.35 ; U4.14@93,24.7 v1(91,24.7) 90.3,24.7 89.3,25.7 89.3,33.95 ; U3.14@93,33.95 89.3,33.95 ; U5.14@93,43.2 83.5,43.2 83.35,43.35 ; U8.23@135.95,100.9 137.807,100.9 v1(137.957,101.05) ; U8.21@135.95,102.9 136.005,102.955 137.75,102.955 137.805,102.9 137.877,102.9 v1(137.957,102.98) ; 83.35,43.35 81.5,41.5 81.5,39.3 86.85,33.95 89.3,33.95
  Bottom Layer w0.75: v2(59.9,79.1) 60.2,79.4 C42.1@60.2,80.8 ; 60.35,78.55 65.75,78.55 74.475,87.275 83.6,87.275 ; v1(89.2,66.6) 88.325,65.725 84.596,65.725 83.975,65.725 83.425,66.275 83.425,87.1 83.775,87.1 84.175,86.7 91.914,86.7 92.239,87.025 92.246,87.025 92.496,87.275 102.704,87.275 104.4,85.579 104.4,77.7 104.4,70.9 104.4,65.6 102.8,64 v1(97.3,64) ; 102.1,87.275 114.475,87.275 117.75,84 129.9,84 P7.3@131.7,85.8 P7.2@134.24,85.8 P7.1@136.78,85.8
VCC+4.2V: C17.1 C43.1 C44.1 R68.2 U2.29 U2.30 U13.2 U13.4 | length 165
  Bottom Layer w0.75: R68.2@48.45,97.1 48.45,96.1 47.1,94.75 U13.2@47.1,93.75 U13.4@47.1,84.2 U13.4@49.3,84.2 ; 54.75,87.45 54.8,87.4 C44.1@54.8,85.775 ; C43.1@57.3,87.45 57.3,78.9 59,77.2 59,49.325 61.2,47.125 71.225,47.125 77.7,40.65 77.7,19.15 80.745,16.105 121.62,16.105 122.22,16.705 ; U2.30@122.48,18.56 122.48,16.965 122.22,16.705 ; C17.1@124,16.7 124,18.54 U2.29@123.98,18.56 123.98,16.705 122.22,16.705
  Bottom Layer w1: U13.4@47.1,84.2 50.35,87.45 54.75,87.45 C43.1@57.3,87.45
VCC+5V: C18.2 C39.1 C40.1 P7.4 P7.5 R61.2 U6.1 U6.7 U6.8 U9.2 U10.3 U12.2 U12.7 | length 140
  Top Layer w0.3: 53.875,89.625 53.875,88.775 52.35,87.25 52.35,85.825 U12.2@53.9,85.825 ; U12.7@58.1,85.825 59.35,85.825 59.45,85.925 59.45,89.625 ; 58.85,89.625 58.7,89.775 58.7,93.35 59.175,93.825 U9.2@60.5,93.825 ; 62.925,87.65 62.95,87.65 R61.2@66.6,91.3
  Top Layer w0.5: U6.7@98.625,102.655 97.755,102.655 97.3,102.2 97.3,100.1 97.775,99.625 99.7,99.625 ; v1(99.7,88.4) 99.7,99.625 ; U6.8@100.875,101.73 C18.2@100.875,99.625 ; U6.1@103.175,102.655 104.145,102.655 104.6,102.2 104.6,100.3 103.9,99.6 100.9,99.6 C18.2@100.875,99.625 ; 99.7,99.625 C18.2@100.875,99.625
  Top Layer w0.75: C40.1@48.9,92.6 49.7,92.6 49.9,92.4 U10.3@51.1,92.4 53.875,89.625 58.85,89.625 59.45,89.625 60.95,89.625 62.925,87.65 65.975,84.6 v2(65.95,84.575)
  Bottom Layer w0.75: C39.1@65.9,87.45 65.95,87.4 C39.1@65.95,86.925 ; v2(65.95,84.575) C39.1@65.95,86.925 ; P7.4@129.16,85.8 P7.5@126.62,85.8 126.62,87.13 125.05,88.7 115.62,88.7 115.545,88.625 114.655,88.625 114.43,88.4 91.7,88.4 91.2,87.9 84.5,87.9 84,88.4 67.425,88.4 C39.1@65.95,86.925
VCC+12V: C36.1 K1.2 K2.2 K3.2 K4.2 K5.2 P3.18 Q4.3 Q9.3 Q11.3 R12.2 R34.2 R38.2 R63.2 U11.1 VD3.1 VD4.1 VD5.1 VD6.1 VD7.1 | length 186.8
  Top Layer w0.5: R63.2@25.2,99.5 25.2,98.5 26.45,97.25
  Top Layer w0.75: K3.2@33.108,43.63 34.538,42.2 VD5.1@35.165,42.2 ; VD6.1@36.435,48.8 38.6,48.8 K4.2@38.62,48.82 ; K2.2@47.078,43.63 48.508,42.2 VD4.1@49.165,42.2 ; VD7.1@48.535,48.8 50.7,48.8 K5.2@50.72,48.82 ; K1.2@61.175,43.63 62.605,42.2 VD3.1@63.365,42.2
  Top Layer w0.8: v2(23.1,76.35) 23.1,76.4 26.72,76.4 27.32,75.8 38.03,75.8 Q4.3@39.25,74.58 40.58,74.58 40.95,74.95 R12.2@42,74.95
  Top Layer w1: P3.18@25.85,95.3 25.85,96.65 26.45,97.25 28.5,99.3 36.83,99.3 Q11.3@38.85,97.28 40.32,97.28 41.45,96.15 R38.2@41.45,95.3 ; v2(28.8,91.1) 37.13,91.1 37.28,90.95 ; Q9.3@38.85,89.38 37.28,90.95 ; R34.2@41.6,90.95 37.28,90.95
  Bottom Layer w0.75: K2.2@47.078,43.63 47.078,46.158 47.1,46.18 ; 50.6,46.18 50.72,46.3 K5.2@50.72,48.82
  Bottom Layer w1: P3.18@25.85,95.3 28.6,95.3 ; v2(28.8,91.1) 28.8,95.1 28.6,95.3 ; U11.1@32,93.95 30.65,95.3 28.6,95.3 ; K3.2@33.108,43.63 35.658,46.18 38.7,46.18 ; K4.2@38.62,48.82 38.62,46.26 38.7,46.18 ; K1.2@61.175,43.63 61.175,44.625 59.62,46.18 50.6,46.18 47.1,46.18 38.7,46.18
  Bottom Layer w1.5: C36.1@24.2,104.85 24.2,96.95 P3.18@25.85,95.3
  Bottom Layer w2: P3.18@25.85,95.3 23.15,92.6 23.15,60.05 30.7,52.5 34.94,52.5 K4.2@38.62,48.82
pads on no net: K2.4 K3.4 P2.0 P3.0 U1.1@146.1,74.1 U1.5 U1.7 U1.8 U1.9 U1.14 U1.19 U1.20 U1.21 U1.22 U1.23 U1.28 U1.33 U1.34 U1.35 U1.36 U1.37 U1.38 U1.39 U1.40 U2.1 U2.2 U2.3 U2.4 U2.5 U2.6 U2.13 U2.14 U2.15 U2.16 U2.17 U2.18 U2.19 U2.24 U2.25 U2.27 U2.32 U2.33 U2.34 U2.35 U2.36 U2.43 U3.10 U3.11 U3.12 U4.10 U4.11 U4.12 U5.10 U5.11 U5.12 U6.4 U6.5 U8.1 U8.2 U8.3 U8.4 U8.6 U8.7 U8.10 U8.12 U8.13 U8.14 U8.15 U8.16 U8.17 U8.18 U8.19 U8.27 U8.28 U9.5 U12.5 X1.5 X2.5 X3.5 Y1.2 Y1.4

## Polygon pours and split planes (outlines as drawn)
GND on Bottom Layer "BOT" (solid, remove dead copper, pour order 2): 1.2,116.3 158.6,116.3 158.6,11 158.2,10.6 155.7,13.1 0.7,13.1
GND on Top Layer "TOP" (solid, remove dead copper, pour order 4): 2.3,117 155.2,117 159.3,112.9 159.1,112.7 159.1,11.9 2.1,11.9 1.6,12.4

## Keep-outs
Keep-Out Layer:
  the board outline again, w0.1

## Other copper
Top Layer:
  pour cut-out: 130.2,73.8 130.5,74.1 142.8,74.1 142.8,64.9 142.7,65 130.2,65
Bottom Layer:
  pour cut-out: 121.2,109.5 121.5,109.2 135.4,109.2 135.4,92.4 135.3,92.5 121.2,92.5
  pour cut-out: 114,42.4 137.6,42.4 137.7,42.3 137.6,42.2 137.6,19.1 114.4,19.1 114.3,19

## Silkscreen, mask and mechanical layers (free items; w line width, h text height)
Top Overlay:
  lines w0.1: 11.7,79.6 13.25,79.6 ; 11.8,93.8 14.2,93.8 ; 11.9,88.4 14.8,88.4 15.2,88.8 16.35,88.8 ; 12,84.7 13.8,86.5 16.4,86.5 17,85.9 17,85 ; 12,87.1 12.7,87.8 15.3,87.8 ; 12.1,81.9 12.6,81.9 14.3,83.6 ; 12.1,98.1 15.1,98.1 16.9,96.3 17.2,96.3 ; 12.3,90.8 13.05,90.8 ; 17.5,73.3 17.7,73.3 18.5,74.1 18.5,77.35 18.25,77.6 ; 17.6,17.8 19.8,17.8 ; 18,103.2 20.05,101.15 20.05,100.35 ; 23.6,71.9 25.4,71.9 25.8,71.9 28.6,74.7 28.6,75.1 28.9,75.4 36.5,75.4 37.2,76.1 37.8,76.1 38.4,76.7 38.4,77.75 ; 23.6,76.1 23.7,76 33.5,76 33.95,76.45 34,76.45 ; 23.7,56.4 23.7,56 25.2,54.5 25.2,53.55 ; 23.7,80.8 31.3,80.8 31.675,80.425 31.8,80.425 ; 23.8,86.6 23.9,86.6 25.2,85.3 25.9,85.3 27.7,83.5 31.8,83.5 32.975,82.325 33.8,82.325 ; 24.8,84.3 26.4,84.3 27.65,83.05 28,83.05 ; 25.1,14.6 25.1,17.25 ; 25.1,93.5 26,93.5 27.5,92 27.5,84.8 28.3,84 34.8,84 35.9,82.9 35.9,82.85 ; 25.619,48.5 28.419,45.7 28.5,45.7 ; 29.7,55.2 31.9,55.2 33.4,56.7 33.4,57.75 ; 34.5,100.4 35,100.4 37.5,97.9 37.5,91.5 38.7,90.3 40.65,90.3 ; 35.8,91.1 36.6,91.1 37.2,90.5 37.2,89.1 37.7,88.6 38.5,88.6 39.9,87.2 40.5,87.2 ; 36.35,59.7 36.7,60.05 36.7,60.9 ; 36.7,68.3 37.1,68.3 37.2,68.4 40.35,68.4 41.05,69.1 ; 38.9,96.2 38.9,95.4 40.6,93.7 40.6,93.3 ; 38.9,98.2 38.9,98.9 38.9,100.1 ; 42.3,52.9 43.7,54.3 44.1,54.3 ; 42.45,78.1 43.7,76.85 43.7,76.6 ; 42.75,81.7 43.65,80.8 44.6,80.8 ; 42.95,72.9 47.5,72.9 49.3,71.1 50.8,71.1 ; 44.9,91.55 44.9,96.1 45.6,96.8 ; 45,87.35 45,87.7 45.3,88 47,88 ; 45.3,57.8 45.3,56.7 45.9,56.1 47.8,56.1 ; 47.3,79.55 47.3,79.6 47.6,79.9 50.5,79.9 51.1,80.5 ; 47.4,91 47.4,91.7 46.8,92.3 ; 47.6,73.875 48.4,73.075 48.4,72.7 ; 47.7,69.6 48.6,68.7 48.6,67.1 ; 47.75,85.9 50.1,85.9 50.7,85.3 51.2,85.3 ; 47.9,59.8 47.9,60.7 48.2,61 48.5,61 ; 51.2,79.55 51.35,79.7 53.4,79.7 ; 56.85,87.05 57.25,87.05 57.5,87.3 59.3,87.3 ; 62.2,38.4 64.8,38.4 65.9,37.3 65.9,35.9 ; 63.45,95.05 64.45,95.05 66.1,96.7 66.9,96.7 67.1,96.9 ; 87.4,63.9 91.9,63.9 ; 94.7,64.5 95.4,63.8 95.4,63.7 ; 129,79.2 129.8,79.2 131,78 ; 131.7,79.9 131.7,79.1 132.8,78 ; 134.4,78 134.4,79.3 ; 136.4,78 136.4,79.2 ; 46.8,92.3 46.8,92.3
Bottom Overlay:
  lines w0.1: 105.2,25.5 106.1,25.5 106.7,26.1 ; 110.85,28.3 110.85,29.25 111.5,29.9 111.5,30.2 112,30.7 114.4,30.7
Mechanical 1:
  the board outline again, w0.1